# Altium PCB PCB-NW0101 Rev.A.PcbDoc (part 3 of 3)
Units mil, origin at the board's own origin, x right, y up, seen from the top; angles counter-clockwise.
Board outline 787.4 x 1377.95 mil, 6 copper layers (Top, GND, Inner3, Inner4, PWR, Bottom), stack 29.136 mil thick; 118 components, 126 nets, 559 pads, 476 vias.
Unrouted connection lines stored in the file: 214.
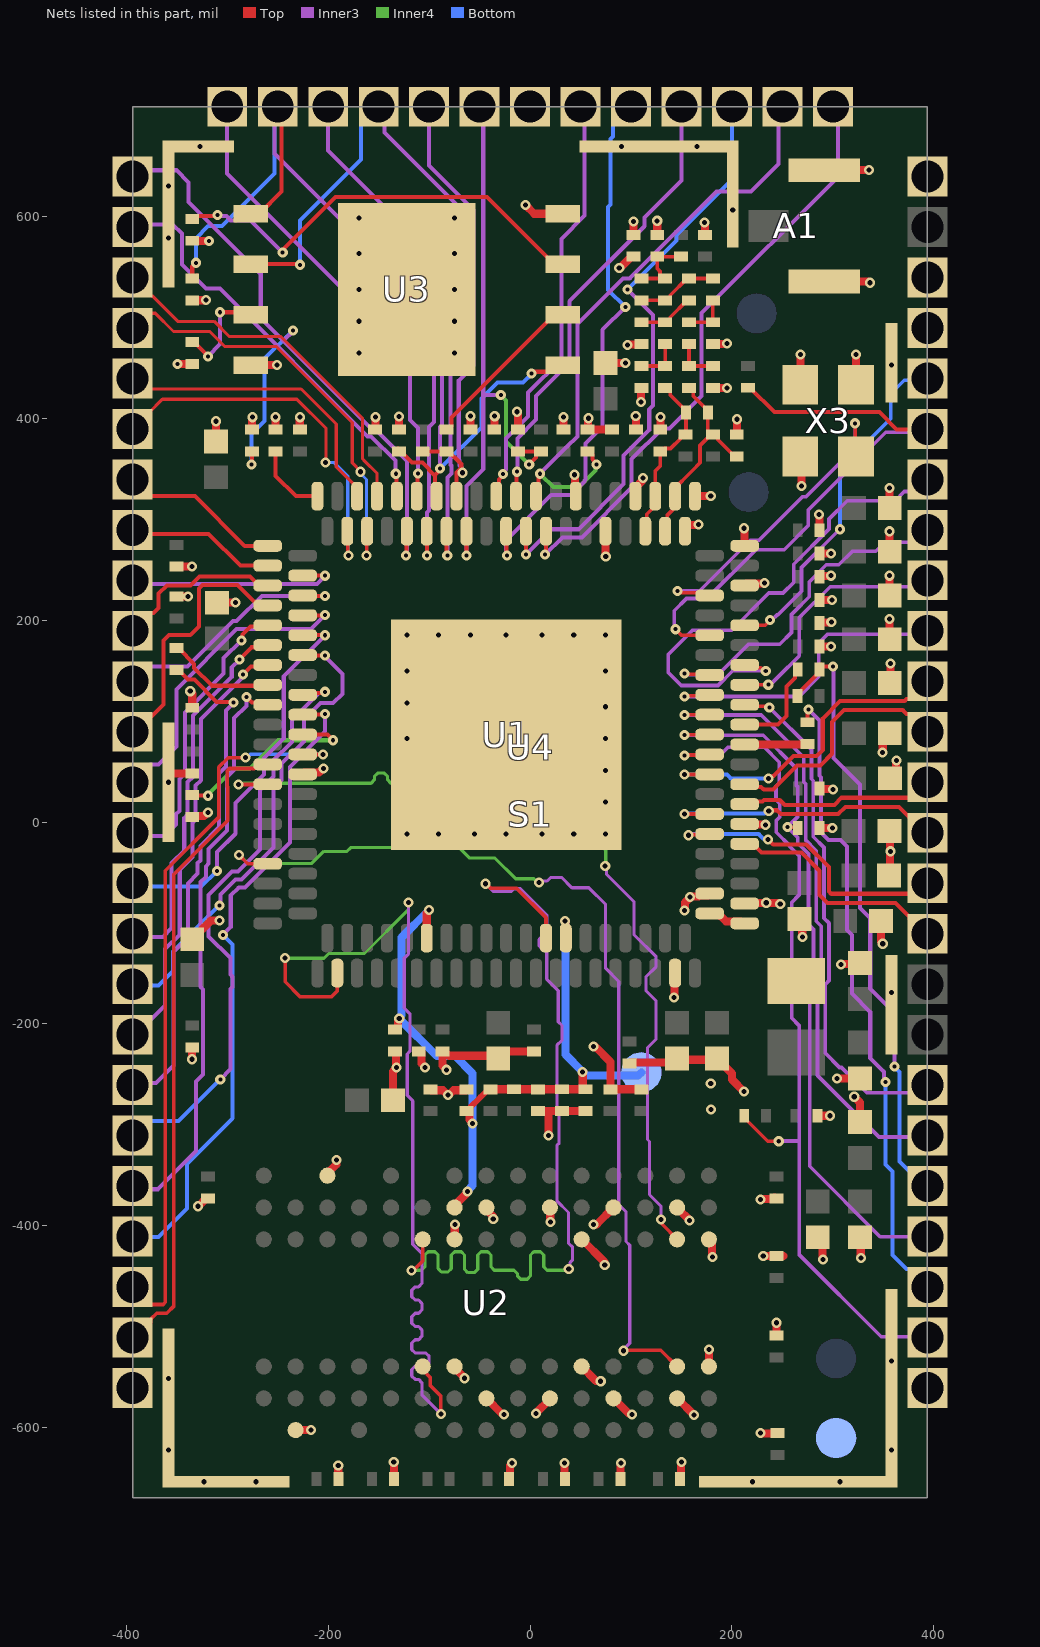
[diagram p7: the nets of this part, all layers, seen from the top]

## Via types
v1: diameter 10, hole 5, Top to Bottom, tented both sides, 397 vias
v2: diameter 10, hole 4, Top to Bottom, tented both sides, 66 vias
v3: diameter 10, hole 5, Top to Bottom, 13 vias

## Nets (pads, with @x,y where several pads share a name; then routed paths per layer and width w, separated by ;. In a path a pad name is that pad's centre, name@x,y a point inside that pad or via, vN(x,y) a via of type N, cw(c..) or ccw(c..) an arc to the next point about the centre after c; other vN are vias at no path point) (continued)
DDR_RAS: U1.81 U2.K7 | length 895.2
  Top w3.63: v1(-242.59,-134.58) -242.59,-158.32 -227.68,-173.23 -196.85,-173.23 -190.95,-167.32 U1.81@-190.95,-149.6 ; U2.K7@-106.3,-539.37 -106.3,-542.72 -98.79,-550.22 -98.79,-558.21 -88.62,-568.38 -88.62,-585.93 v1(-88.24,-586.32)
  Inner3 w3.1: v1(-120.55,-79.6) -120.55,-130.84 -124.65,-134.94 -124.65,-184.31 -119.02,-189.95 -119.02,-227.13 -121.65,-229.76 -121.65,-270.77 -116.22,-276.2 -116.22,-418.41 -106.9,-427.73 -106.9,-448.62 -107.14,-448.85 -107.14,-453 -107.14,-457.19 -110.42,-460.46 -113.87,-460.46 -117.14,-463.74 -117.14,-470.29 -113.87,-473.56 -110.42,-473.56 -107.14,-476.84 -107.14,-483.39 -110.42,-486.67 -113.87,-486.67 -117.14,-489.94 -117.14,-496.49 -113.87,-499.77 -110.42,-499.77 -107.14,-503.04 -107.14,-509.59 -110.42,-512.87 -113.87,-512.87 -117.14,-516.14 -117.14,-522.7 -113.87,-525.97 -103.23,-525.97 -99.95,-529.25 -99.95,-535.8 -103.23,-539.07 -113.87,-539.07 -117.14,-542.35 -117.14,-548.9 -113.87,-552.17 -110.42,-552.17 -107.14,-555.45 -107.14,-557 -107.14,-567.47 -88.3,-586.32 v1(-88.24,-586.32)
  Inner4 w3.09: v1(-242.59,-134.58) -242.17,-135 -204.05,-135 -199.27,-130.22 -163.93,-130.22 -120.55,-86.84 v1(-120.55,-79.6)
DDR_UDM: U1.64 U2.B3 | length 901.2
  Top w3.63: v1(-288.98,37.02) -288.79,37.21 -260.03,37.21 U1.64@-259.84,37.4 ; v1(129.62,-393.67) 130.84,-394.88 130.84,-398.56 U2.B3@145.67,-413.39
  Inner3 w3.1: v1(74.45,-43.65) 75.77,-44.97 75.77,-51.69 102.8,-78.71 102.8,-111.39 124.9,-133.49 124.9,-143.26 114.9,-153.26 114.9,-167.28 124.9,-177.28 124.9,-214.91 116.34,-223.46 116.34,-314.51 118.29,-316.46 118.29,-369.12 129.62,-380.45 v1(129.62,-393.67)
  Inner4 w3.09: v1(-288.98,37.02) -287.68,38.32 -283.84,38.32 -283.74,38.43 -159,38.43 -157.46,38.43 -154.18,41.7 -154.18,45.16 -150.91,48.43 -144.37,48.43 -141.1,45.16 -141.1,41.7 -137.83,38.43 -131.28,38.43 -128.01,41.7 -128.01,45.16 -124.74,48.43 -118.2,48.43 -114.93,45.16 -114.93,41.7 -111.65,38.43 -105.11,38.43 -101.84,41.7 -101.84,45.16 -98.57,48.43 -92.02,48.43 -88.75,45.16 -88.75,41.7 -85.48,38.43 -78.94,38.43 -75.67,41.7 -75.67,45.16 -72.39,48.43 -65.85,48.43 -62.58,45.16 -62.58,41.7 -59.31,38.43 -43,38.43 8.57,38.43 75,-28 75,-43.1 v1(74.45,-43.65)
DDR_UDQS: U1.72 U2.B7 | length 947.3
  Top w3.63: v1(-288.38,-32.62) -279.66,-41.34 U1.72@-259.84,-41.34 ; v1(92.45,-523.78) 92.92,-523.3 129.6,-523.3 U2.B7@145.67,-539.37
  Inner3 w3.1: v1(9.04,-59.74) 10.36,-58.42 16.95,-58.42 20.39,-54.98 31.36,-54.98 41.49,-65.11 58.33,-65.11 74.9,-81.68 74.9,-144.94 87.93,-157.98 87.93,-378.93 95.04,-386.03 95.04,-415.62 98.74,-419.33 98.74,-516.42 92.45,-522.72 v1(92.45,-523.78)
  Inner4 w3.09: v1(-288.38,-32.62) -287.95,-32.62 -279.57,-41 -216.11,-41 -204.19,-29.09 -181.27,-29.09 -177.56,-25.38 -70.19,-25.38 -59.83,-35.74 -34.65,-35.74 -14.13,-56.26 3.69,-56.26 7.17,-59.74 v1(9.04,-59.74)
DDR_VREF: C4.1 C5.1 C11.2 C12.1 C13.1 pad.6 R1.1 R2.2 U1.90 U1.104 U2.J2 | length 789.8
  Top w6: C4.1@-61.02,-286.42 -59.1,-284.5 -59.1,-282.58 -49.1,-272.58 -49.1,-272.53 -40.57,-264 C11.2@-38,-264
  Top w8: C12.1@-133.8,-205.1 -133.49,-204.79 -130.97,-204.79 -130.97,-196.53 -129.57,-195.12 v1(-129.57,-194.58) ; U1.90@-102.36,-114.96 -102.36,-90.03 -99.9,-87.57 v1(-99.9,-87.03) ; U2.J2@-74.8,-381.89 -74.8,-379.73 -62.51,-367.43 -62.51,-366.25 v1(-62.13,-365.87) ; C4.1@-62.99,-286.42 -61.02,-286.42 -60.1,-287.34 -60.1,-294.97 -56.9,-298.17 v1(-56.9,-298.71) ; C11.2@-39.37,-264.76 R1.1@-15.75,-264.76 R2.2@7.87,-264.76 C13.1@31.5,-264.76 52.23,-264.76 52.23,-248.78 51.76,-248.32 v1(51.76,-247.77) ; v1(34.7,-97.98) 35.07,-98.35 35.07,-114.59 U1.104@35.43,-114.96
  Bottom w8: v1@-129.57,-194.04 -128.57,-193.04 -128.57,-192.26 -127.34,-191.03 -127.34,-114.47 v1@-100.29,-87.41 ; v1@-129.15,-195 -92.15,-232 -74,-232 -56.9,-249.1 -56.9,-360.19 -62.13,-365.42 v1(-62.13,-365.87) ; v1(34.7,-97.98) 35,-98.28 35,-230.47 51.76,-247.23 v1(51.76,-247.77) 52.3,-247.77 55.61,-251.08 107.19,-251.08 pad.6@110.24,-248.03
DDR_WE: U1.102 U2.K3 | length 876.3
  Top w3.63: v1(-117.46,-444.2) -115.73,-444.2 -110.51,-438.98 ; -110.47,-438.98 -106.39,-434.91 -106.39,-414.39 U2.K3@-106,-414 ; v1(-44.17,-61.17) -43.28,-61.17 -38.69,-65.76 -13.18,-65.76 15.75,-94.69 U1.102@15.75,-114.96
  Inner3 w3.1: v1(-44.17,-61.17) -43.83,-61.17 -36.47,-68.53 -18.48,-68.53 -16.01,-66.06 -9.62,-66.06 16.61,-92.29 16.61,-95 16.61,-109.65 13.34,-112.93 12.18,-112.93 8.91,-116.2 8.91,-122.75 12.18,-126.03 13.34,-126.03 16.61,-129.3 16.61,-145 16.61,-155.61 28,-167 28,-177.62 28,-197.88 31.66,-201.54 31.66,-216.19 26.63,-221.22 26.63,-283.52 28.75,-285.65 28.75,-318.23 26.63,-320.35 26.63,-375.29 38.1,-386.76 38.1,-417.27 42.13,-421.3 42.13,-433.74 39.67,-436.2 39.67,-441.56 v1(38.35,-442.88)
  Inner4 w3.09: v1(-117.46,-444.2) -117.25,-444 -109,-444 -107.46,-444 -104.18,-440.73 -104.18,-429 -100.91,-425.73 -94.37,-425.73 -91.1,-429 -91.1,-442.45 -87.83,-445.72 -81.28,-445.72 -78.01,-442.45 -78.01,-429 -74.74,-425.73 -68.2,-425.73 -64.93,-429 -64.93,-443.16 -61.65,-446.44 -55.11,-446.44 -51.84,-443.16 -51.84,-429 -48.57,-425.73 -42.02,-425.73 -38.75,-429 -38.75,-440.73 -35.48,-444 -15.85,-444 -12.58,-447.27 -12.58,-449.64 -9.31,-452.91 -2.77,-452.91 0.51,-449.64 0.51,-429 3.78,-425.73 10.32,-425.73 13.59,-429 13.59,-440.73 16.86,-444 20,-444 37.22,-444 v1(38.35,-442.88)
EPHY_VRT: R23.1 U1.39 | length 73.8
  Top w4: R23.1@-251.97,367.13 -251.97,342.97 -231.84,322.84 U1.39@-210.63,322.84
ETH_RN: U1.34 U4.B4 | length 411.8
  Top w3.12: U4.B4@-381,504 -371.31,504 -353.18,485.87 -317.12,485.87 -302.12,470.88 -251.19,470.88 -176.11,395.8 -176.11,355.71 -168,347.6 v1(-168,347) ; v1(-162,264) -161.71,264.29 -161.71,287.9 U1.34@-161.42,288.19
  Bottom w3.12: v1(-168,347) -168,345.31 -162,339.31 v1(-162,264)
ETH_RP: U1.33 U4.B3 | length 348
  Top w3.12: U4.B3@-379.17,524.83 -375.57,521.24 -374.24,521.24 -348.99,495.99 -312.93,495.99 -297.93,481 -247,481 -165.99,399.99 -165.99,359.9 -163.65,357.56 -151.58,345.51 U1.33@-151.58,322.84
ETH_TN: U1.36 U4.B6 | length 358.9
  Top w3.12: U4.B6@-378,405.07 -364.2,418.86 -230.93,418.86 -202.12,390.05 -202.12,356.44 v1(-202.56,356) ; U1.36@-181.1,288.19 -180.55,287.64 -180.55,264.55 v1(-180,264)
  Bottom w3.12: v1(-202.56,356) -193.79,356 -180.55,342.76 -180.55,264.55 v1(-180,264)
ETH_TP: U1.35 U4.B5 | length 284.6
  Top w3.12: U4.B5@-380.51,424.8 -376.33,428.98 -371.16,428.98 -226.74,428.98 -192,394.24 -192,351.84 -171.26,331.1 U1.35@-171.26,322.84
GND: A1.2 A1.3 C1.2 C2.2 C3.2 C4.2 C5.2 C6.2 C7.2 C8.2 C9.2 C10.2 C12.2 C13.2 C14.2 C15.2 C16.2 C17.2 C18.2 C19.2 C20.2 C21.2 C22.2 C23.2 C24.2 C25.2 C26.2 C27.2 C28.2 C29.2 C30.2 C31.2 C32.2 C33.2 C34.2 C35.2 C36.2 C37.2 C38.2 C39.2 C40.2 C41.2 C42.2 C43.2 C44.2 C45.2 C46.2 C47.2 C48.2 C49.2 C50.2 C51.1 C52.2 C54.2 C55.2 C58.2 C61.2 C62.2 C63.1 C64.2 C65.2 C66.2 C67.2 C68.2 C69.2 C70.2 C71.2 C72.2 C73.2 C74.2 C75.2 C76.2 C77.2 C78.2 C79.2 C80.2 L5.2 pad.2 R2.1 R8.1 R15.1 R17.1 R18.1 R19.1 R23.2 R24.2 S1.1 S1.2 S1.3 S1.4 S1.5 S1.6 S1.7 S1.8 S1.9 S1.10 S1.11 U1.1 U1.2 U1.7 U1.10 U1.13 U1.63 U1.115 U1.120 U1.121 U1.128 U1.152 U1.156 U1.157 U2.A3 U2.A7 U2.B2 U2.B8 U2.D2 U2.D8 U2.E3 U2.E7 U2.F2 U2.F8 U2.H2 U2.H8 U2.J3 U2.J7 U2.N1 U2.P9 U3.4 U3.9 U4.B25 U4.C1 U4.C3 U4.C4 U4.C25 X3.1 X3.2 X3.4 | length 2465.2
  Top w8: v1(-358.27,39.37) -358.27,46.32 -356.36,48.23 C34.2@-334.65,48.23 ; C14.2@-350.39,223.43 -350.34,223.37 -338.86,223.37 v1(-338.81,223.32) ; C16.2@-350.39,252.95 v1(-335,253) ; v1(-336.63,129.58) -336.63,129.04 -334.65,127.06 C23.2@-334.65,113.19 ; v1(-335,-235) -334.82,-234.82 -334.82,-223.6 C64.2@-334.65,-223.43 ; C1.2@-334.65,-116.14 -316.11,-97.6 v1(-307.5,-97.6) ; R24.2@-334.65,4.92 -333.72,5.84 -323.14,5.84 -319.54,9.44 v1(-319,9.44) ; v1(-328.9,-380.62) -328.45,-380.62 -320.87,-373.03 C9.2@-318.9,-373.03 ; C17.2@-311,377 v1@-311,396 ; C35.2@-310,217.2 -309.88,217.32 -292.09,217.32 v3(-291.97,217.45) ; U3.4@-276.55,452.56 v1(-250.55,452.56) ; R17.1@-275.59,388.78 -275.3,389.08 -275.3,400.7 v1(-275,401) ; R23.2@-251.97,388.78 v1(-252,401) ; U2.P9@-232.28,-602.36 v1(-217.1,-602.36) ; v1(-228,401) -228.17,400.83 -228.17,389.7 C80.2@-227.64,389.17 ; U1.63@-225.2,47.25 -223.38,49.07 -209.02,49.07 -205.25,52.84 v1(-204.71,52.84) ; U2.N1@-200.79,-350.39 -200.79,-348.23 v1@-191.93,-339.37 ; v1(-191.55,-334.91) v1@-191.17,-334.52 ; C70.2@-189.98,-649.05 v1(-189.98,-637.52) ; C15.2@-153.27,388.8 -153.27,400.73 v1(-153,401) ; C74.2@-135.83,-275.59 -135.83,-247.16 -132.2,-243.54 v1(-132.2,-243) -132.59,-242.62 -132.59,-228.28 -133.51,-227.36 C12.2@-133.86,-227.36 ; v1(-135,-634) -134.92,-634.08 C67.2@-134.92,-653.46 ; R18.1@-129.92,388.78 v1(-129.92,401.57) ; C22.2@-110.24,-227.36 -108.27,-227.36 -107.35,-228.28 -107.35,-239.11 -104,-242.46 v1(-104,-243) ; C73.2@-98.42,-264.76 -97.5,-265.69 -86.37,-265.69 -82.01,-270.05 -81.05,-270.05 v1@-81,-270 ; C20.2@-86.61,-228.28 -83.72,-228.28 -80.44,-231.57 -34.18,-231.57 C2.2@-31.5,-234.25 ; C20.2@-86.61,-227.36 -86.61,-228.09 -86.81,-228.28 -86.81,-241.1 -82.58,-245.33 v1(-82.58,-245.45) ; v1(-81.09,-270.43) -80.55,-270.43 -75.8,-265.69 -63.91,-265.69 C4.2@-62.99,-264.76 ; U2.J7@-74.8,-539.37 -74.8,-540.65 -65,-550.46 v1(-65,-551) ; U2.J3@-74.8,-413.39 -74.59,-413.18 -74.59,-399.1 v1(-74.38,-398.88) ; C19.2@-59.03,388.81 v1@-59.03,401.55 ; U2.H8@-43.31,-570.87 -27.56,-586.62 -26.38,-586.62 v1(-26,-587) ; U2.H2@-43.31,-381.89 -43.31,-384.05 -36.84,-390.53 -36.84,-392.91 v1(-36.45,-393.29) ; C24.2@-35.43,388.78 -35.22,389 -35.22,401.36 v1@-35.43,401.57 ; v1@-35.22,401.78 v1(-35,402) ; C2.2@-31.5,-231.57 -27.29,-227.36 C77.2@3.94,-227.36 ; C69.2@-20.33,-653.21 -19.75,-652.62 -19.75,-637.29 -18,-635.54 v1(-18,-635) ; v1(-13,406.43) -13,405.89 -11.91,404.8 -11.91,389.7 -11.81,389.61 R19.1@-11.81,388.78 ; v1(6,-586) 6,-585.46 19.68,-571.77 U2.F8@19.68,-570.87 ; R2.1@9.84,-286.42 31.62,-286.42 56.59,-286.42 55.6,-287.4 C5.2@55.12,-287.4 ; v1(18.2,-310.74) 18.2,-286.48 18.26,-286.42 ; U2.F2@19.68,-381.89 19.98,-382.19 19.98,-395.85 v1(20.28,-396.15) ; C43.2@33,388.83 v1(33,401) ; v1(34,-635) 34.22,-635.22 34.22,-652.77 C68.2@34.72,-653.27 ; v1(44,344) 44.38,343.62 44.38,323.73 U1.13@45.28,322.84 ; U2.E7@51.18,-539.37 65.43,-553.62 69.62,-553.62 v1(70,-554) ; U2.E3@51.18,-413.39 73.61,-435.81 73.61,-438.62 v1(73.99,-439) ; R15.1@55.3,388.83 C46.2@81,388.83 ; R15.1@56.7,388.83 57.62,389.75 57.62,399.61 v1(58,399.99) ; v1(62.85,-398.9) 63.24,-398.52 66.05,-398.52 U2.D2@82.68,-381.89 ; v3(63.02,-222.23) 63.41,-222.61 64.78,-222.61 79.81,-237.65 C65.2@79.81,-264.76 C72.2@110.24,-264.76 ; U1.10@74.8,288.19 74.9,288.09 74.9,263.1 v1(75,263) ; C42.2@74.8,454.72 74.87,454.79 94.28,454.79 v1(94.35,454.86) ; U2.D8@82.68,-570.87 98.43,-586.62 100.62,-586.62 v1(101,-587) ; v3(88.38,548.95) 88.76,549.33 89.68,549.33 100.39,560.04 C75.2@102.36,560.04 ; C8.2@89.78,-653.33 89.78,-635.22 v1(90,-635) ; v1(96.56,472.44) 96.56,473.21 110.02,473.21 L5.2@110.24,473.43 ; C78.2@98.42,-239.17 99.35,-238.25 141.67,-238.25 C3.2@145.67,-234.25 ; U1.7@104.33,322.84 104.33,331.18 111.32,338.16 111.32,340.45 v1(111.7,340.84) ; v1@104.7,403.05 105,402.75 C47.2@105,388.83 ; v1(110,416) 110.12,416.12 110.12,430 C55.2@110.24,430.12 ; C61.2@125.98,581.69 v1(125.97,595.59) ; C51.1@129,388.83 129.04,388.87 129.04,401.01 v1(129.08,401.05) ; v1(142.7,-174) 143.09,-173.62 143.09,-150.22 U1.115@143.7,-149.6 ; U2.B8@145.67,-570.87 145.8,-570.87 162.28,-587.35 v1(162.4,-587.35) ; U2.B2@147,-383 147,-383.57 157.83,-394.4 v1(157.83,-394.74) ; C7.2@148.81,-653.35 149.54,-652.62 149.54,-635 150,-634.54 v1(150,-634) ; C3.2@148.94,-230.98 153.48,-235.52 186.3,-235.52 200.02,-249.23 200.02,-255.12 v1(212.04,-267.14) ; v3(153.15,-87.46) 153.53,-87.08 153.53,-79.57 158.38,-74.72 v1(158.38,-74.18) 158.76,-73.8 166.68,-73.8 167.79,-72.69 176.13,-72.69 U1.121@177.95,-70.86 ; U1.2@153.54,288.19 153.54,292.34 155.44,294.23 166.58,294.23 v1(166.97,294.62) ; U1.1@163.39,322.84 163.47,322.92 178.92,322.92 v1(179,323) ; v1(173,594) 173.11,593.89 173.11,581.81 C62.2@173.23,581.69 ; U2.A7@177.16,-539.37 v1(177.16,-522.37) ; U2.A3@177.16,-413.39 177.16,-415.55 180.34,-418.72 180.34,-430.7 v1(180.72,-431.09) ; C54.2@181.1,430.12 181.16,430.06 194.94,430.06 v1(195,430) ; C58.2@181.1,473.43 181.39,473.71 194.71,473.71 v1(195,474) ; C52.2@201.83,384.75 204.86,384.75 204.86,398.86 v1(205,399) ; v1(212,291) 212.3,290.7 212.3,273.92 U1.156@212.6,273.62 ; U1.120@212.6,-80.71 212.95,-80.35 233.65,-80.35 v1(234,-80) 234.38,-80.38 246.43,-80.38 247.33,-81.29 v3(247.88,-81.29) ; U1.128@212.6,-1.97 212.99,-2.36 232.8,-2.36 v1(233.18,-2.74) ; U1.152@212.6,234.25 214.42,236.08 230.99,236.08 231.64,236.73 v1(232.18,236.73) ; v1(228.35,-605.32) 228.73,-605.7 244.48,-605.7 C10.2@245.08,-606.3 ; v1(228.35,-374.02) 228.73,-373.63 241.2,-373.63 241.95,-372.88 C6.2@241.95,-372.11 ; v1(231,-430) 231.06,-430.06 245.08,-430.06 251.02,-430.06 251.07,-430.12 ; C71.2@244.09,-508.86 v1(244.09,-496.06) ; C26.2@262.19,-95.38 269.62,-102.81 269.62,-113.62 v1(270,-114) ; X3.1@268,437.29 v1(268,463) ; v1(269,333) X3.2@269,356.98 ; C50.2@284.83,-291 v1(297,-291) ; C79.2@285,-411.42 289.89,-416.31 289.89,-433.12 v3(290.27,-433.5) ; v1(286.32,304.64) 286.58,304.39 286.58,289.25 C45.2@286.83,289 ; C39.2@286.41,264.77 287.64,266 v1(298,266) ; R8.1@286.83,-6 v1(299.41,-6) ; C63.1@286.83,33 287.13,32.7 299.77,32.7 v1(300.07,32.4) ; C18.2@286.83,197 287.53,197.7 298.03,197.7 v1(298.41,198.09) ; C41.2@287.05,219.53 287.39,219.87 299,219.87 v1(299.13,219.74) ; C37.2@287.25,243 287.25,243.12 287.75,243.62 297.62,243.62 v1(298,244) ; C21.2@291.23,174 v1(298,174) ; A1.2@291.34,535.43 291.4,535.37 334.89,535.37 336.04,534.21 v1(336.58,534.21) ; A1.3@291.34,645.67 291.37,645.71 v1(335.93,645.74) v1(335.93,645.74) ; v1(304,-254) C30.2@322.97,-253.97 ; v1(308,-141) 308.38,-140.62 318.96,-140.62 322.83,-136.74 C31.2@322.83,-136.53 ; v1(321.16,-272.16) 326.89,-277.89 326.89,-293.19 C49.2@322.83,-297.24 ; C48.2@322.83,-411.42 327.62,-416.2 327.62,-431.62 v1(328,-432) ; X3.4@323,437.17 v1(323,463) ; C25.2@347.72,-94.06 347.72,-118.33 349.42,-120.03 v1(349.42,-120.57) ; C27.2@348.3,-55.12 C27.2@348.65,-55.47 ; v1(349,69) 349.38,69.38 349.38,80.95 C29.2@356.43,88 ; C28.2@355.85,-9 C28.2@355.92,-9.08 ; C27.2@356,-54 356.62,-53.38 356.62,-29.38 v1(357,-29) 356.62,-28.62 356.62,-12.38 C28.2@358,-11 ; v1(356,201) 356.15,200.85 356.15,181.25 C40.2@356.3,181.1 C40.2@356.3,185 ; v1(356,244) 356.15,243.85 356.15,224.56 C36.2@356.3,224.41 C36.2@356.3,230 ; v1(356,288) 356.15,287.85 356.15,262.54 356.62,262.08 356.3,261.76 C38.2@356.3,268 ; v1(356,331) 356.15,330.85 356.15,311.17 C44.2@356.3,311.02 ; C32.2@356.3,43.31 362.62,49.63 362.62,60.62 v1(363,61) ; C33.2@356.3,137.79 357,138.5 v1@357,156
  other v1: -322.83,-653.54 -271.65,-653.54 220.47,-653.54 307.09,-653.54 -358.27,-622.05 358.27,-622.05 -358.27,-551.18 358,-534 358,-169 -122.05,-11.81 -90.55,-11.81 -55.12,-11.81 -23.62,-11.81 11.81,-11.81 43.31,-11.81 74.8,-11.81 74.8,19.69 74.8,51.18 -122.05,82.68 74.8,82.68 74.8,114.17 -122.05,118.11 -122.05,149.61 74.8,149.61 357,157 -122.05,185.04 -90.55,185.04 -59.06,185.04 -23.62,185.04 11.81,185.04 43.31,185.04 74.8,185.04 -311,397 -59,402 104.7,402.05 358.27,452.76 -169.29,464.57 -74.8,464.57 -169.29,496.06 -74.8,496.06 -169.29,527.56 -74.8,527.56 -169.29,562.99 -74.8,562.99 -358.27,578.74 -169.29,598.43 -74.8,598.43 200.79,606.3 -358.27,629.92 -326.77,669.29 90.55,669.29 165.35,669.29
  other v3: 179.12,-284.86 179.03,-259.22
I2C_SCL: U1.20 U4.A5 | length 521.4
  Top w4: U1.20@-23.62,288.19 -23.31,287.88 -23.31,264.31 v2(-23,264)
  Inner3 w4: v2(-23,264) -24,265 -24,279 21,324 40.56,324 54,337.44 54,338.29 55,339.29 55,375 72,392 72,487.65 v2(94.35,510)
  Bottom w4: U4.A5@82.31,690.98 82.31,679.24 79.55,676.47 79.55,611.52 77.38,609.35 77.38,526.96 v2(94.35,510)
I2C_SDA: U1.21 U4.A6 | length 404.3
  Top w4: U1.21@-33.46,322.84 -30.88,325.42 -30.88,339.18 -26.68,343.38 v2(-26.68,344.74)
  Inner3 w4: v2(-26.68,344.74) -26.68,346.36 -23.82,349.22 -23.82,380.06 -2,401.88 -2,425.31 31,458.31 31,577.77 54,600.77 U4.A6@54,690.92
I2S_CLK: U1.19 U4.A4 | length 436.5
  Top w4: U1.19@-13.78,322.84 -13.3,323.31 -13.3,346.52 v2(-12.82,347)
  Inner3 w4: v2(-12.82,347) -12.53,347.29 -12.53,380.03 6,398.57 6,422 39,455 39,515.89 113.29,590.18 113.29,598.85 150,635.56 U4.A4@150,691.51
I2S_SDI: U1.16 U4.A1 | length 585
  Top w4: v2(15,265) 15.75,265.75 U1.16@15.75,288.19
  Inner3 w4: v2(15,265) 32,282 51.31,282 100.7,331.39 100.7,359.6 131.14,390.05 138.05,390.05 170,422 170,504.11 305,639.11 U4.A1@305,690.98
I2S_SDO: R15.2 U1.17 U4.A2 | length 583.4
  Top w4: U1.17@5.91,322.84 8.49,325.42 8.49,341.87 10,343.38 v2(10,345) ; R15.2@57,367.17 58.97,367.17 61.89,364.25 61.89,359.34 66,355.23 v2(66,354)
  Inner3 w4: v2(10,345) 36.35,371.35 47,382 47,493.56 92,538.56 98.76,538.56 184.68,624.48 218.82,624.48 246.32,651.97 U4.A2@246.32,692.88
  Inner4 w4: v2@11,344 23,332 48.56,332 64.85,348.3 64.85,352.85 v2(66,354)
I2S_WS: U1.18 U4.A3 | length 570.7
  Top w4: v2(-4,265) -3.94,265.06 U1.18@-3.94,288.19
  Inner3 w4: v2(-4,265) 21,290 48,290 92.7,334.7 92.7,362.92 118.08,388.3 118.08,408.52 122,412.44 122,502.11 v2(96.55,527.56)
  Bottom w4: v2(96.55,527.56) 145,576 145,581.56 200,636.56 U4.A3@200,691.11
IO11: U1.29 U4.A13 | length 446.6
  Top w4: U1.29@-112.2,322.84 -111.6,323.44 -111.6,344.6 v2(-111,345.2)
  Inner3 w4: U4.A13@-300,690.61 -300,642.33 -118.92,461.25 -118.92,398.37 -111,390.44 v2(-111,345.2)
IO14: U1.40 U4.B7 | length 136.6
  Top w4: U4.B7@-376.01,322.83 -331.83,322.83 -282.62,273.62 U1.40@-259.84,273.62
IO15: U1.42 U4.B8 | length 129.4
  Top w4: U4.B8@-376.13,285.53 -318.53,285.53 -286.94,253.94 U1.42@-259.84,253.94
IO16: U1.43 U4.B9 | length 198.3
  Top w4: U1.43@-225.2,244.1 -203.1,244.1 v2(-203,244)
  Inner3 w4: U4.B9@-375.74,236 -211,236 v2(-203,244)
IO17: U1.44 U4.B10 | length 151.5
  Top w4: U4.B10@-382,201.07 -376.01,207.05 -372.95,207.05 -372,208 -371.92,208 -367.89,212.03 -367.89,226.22 -359.77,234.35 -336.28,234.35 -327.61,243.01 -277.23,243.01 -268.47,234.25 U1.44@-259.84,234.25
IO38: R8.2 U1.137 U4.C22 | length 700.3
  Top w3.63: v2(153,86) 153.31,86.31 177.64,86.31 U1.137@177.95,86.62 ; v2(254.91,-5.09) v2@256.09,-5.09 ; v2@256,-5 v2@256.09,-5.09 ; R8.2@265.17,-6 R8.2@264.26,-5.09 ; R8.2@267,-5 266.91,-5.09 R8.2@264.26,-5.09 ; v2@256.09,-5.09 R8.2@264.26,-5.09
  Inner3 w3.63: v2(153,86) 231,86 263.55,53.45 263.55,36.44 265.32,34.67 265.32,5.51 254.91,-4.91 v2(254.91,-5.09) 265.11,-15.29 265.11,-20.75 275.91,-31.56 275.91,-101.56 280.82,-106.47 280.82,-150.8 277.06,-154.55 277.06,-341.06 346.76,-410.76 373.86,-410.76
IO44: U1.144 U4.C7 | length 473.9
  Top w3.63: U1.144@212.6,155.51 215.26,152.85 228.7,152.85 231.78,149.78 v2(233.5,149.78)
  Inner3 w3.63: v2(233.5,149.78) 200.87,149.78 186.28,135.18 149.82,135.18 137,148 137,166 161,190 199.7,190 236.52,226.82 250.65,226.82 261.2,237.36 261.2,255.29 296.18,290.28 296.18,300.18 314.35,318.35 361.66,318.35 370.69,327.39 U4.C7@378.57,327.39
JTAG_TCK: U1.140 U4.C19 | length 491.7
  Top w3.63: U1.140@212.6,116.14 213.97,114.77 235.78,114.77 v2(237,113.55)
  Inner3 w3.63: v2(237,113.55) 278.82,71.73 278.82,42.76 280.59,40.99 280.59,-14.65 291.18,-25.24 291.18,-95.24 296.09,-100.14 296.09,-157.12 292.33,-160.87 292.33,-228.89 306.62,-243.18 308.48,-243.18 333.5,-268.21 373.82,-268.21
JTAG_TDI: U1.142 U4.C9 | length 233.3
  Top w3.63: U1.142@212.6,135.83 212.68,135.91 235.91,135.91 v2(236,136)
  Inner3 w3.63: v2(236,136) 237.72,136 240.48,138.76 240.76,138.76 245.68,143.68 266.57,164.57 266.57,202.48 297.28,233.18 376.71,233.18 377.53,234 U4.C9@383,234
JTAG_TDO: U1.143 U4.C8 | length 323.5
  Top w3.63: v2(153.15,147.15) 153.89,146.41 177.21,146.41 U1.143@177.95,145.67
  Inner3 w3.63: v2(153.15,147.15) 154.3,146 186.3,146 216.48,176.18 247.48,176.18 258.94,187.64 258.94,205.64 276.47,223.17 276.47,237.76 293.52,254.82 305.91,254.82 319.45,268.35 342.52,268.35 351.17,277 U4.C8@377.39,277
JTAG_TMS: U1.141 U4.C10 | length 294.7
  Top w3.63: v2(153,124.37) 153.81,125.18 177.14,125.18 U1.141@177.95,125.99
  Inner3 w3.63: v2(153,124.37) 266.37,124.37 286,144 286,177.3 294.7,186 U4.C10@377,186
JTAG_TRST: U1.139 U4.C20 | length 600.5
  Top w3.63: v2(153,106) 153.15,106.15 177.8,106.15 U1.139@177.95,106.3
  Inner3 w3.63: v2(153,106) 229,106 271.18,63.82 271.18,39.6 272.96,37.83 272.96,-17.81 283.55,-28.4 283.55,-98.4 288.45,-103.3 288.45,-153.96 284.7,-157.71 284.7,-251 345.7,-312 U4.C20@375.67,-312
LXBK: L1.1 U1.118 U1.119 | length 37.4
  Top w8: U1.119@177.95,-90.55 186.29,-90.55 194.31,-98.57 208.57,-98.57 U1.118@211,-101
PCIE_CKN: U1.132 U4.C12 | length 226.2
  Top w4.09: U1.132@213.2,37.4 215.77,34.83 228.9,34.83 231.54,32.19 240.69,32.19 264.62,56.12 287.58,56.12 299.09,67.63 299.09,98.94 311,110.85 369.17,110.85 373.01,107.01 376.06,107.01 379.96,103.11 U4.C12@379.96,99.96
PCIE_CKP: U1.133 U4.C11 | length 300.6
  Top w4.09: v1(153,47) 153.12,47.12 177.83,47.12 U1.133@177.95,47.25 ; v1(236.12,43.23) 237.72,43.23 240.12,45.64 241.28,45.64 260.86,65.21 283.81,65.21 290,71.4 290,102.71 307.23,119.94 371.22,119.94 373.01,121.73 U4.C11@376.06,121.73
  Bottom w4.08: v1(153,47) 195,47 198.88,43.12 236,43.12 v1(236.12,43.23)
PCIE_RXN: U1.130 U4.C13 | length 175.7
  Top w4.09: U1.130@212.6,17.72 215.17,20.29 230.29,20.29 231.91,21.91 247.36,21.91 252.31,16.95 301.49,16.95 308.63,24.09 U4.C13@381.57,24.09
PCIE_RXP: U1.129 U4.C14 | length 259
  Top w4.09: v1(153,8) 153.06,7.94 177.89,7.94 U1.129@177.95,7.88 ; v1(236.49,10.86) 237.24,11.61 244.8,11.61 248.55,7.86 305.26,7.86 312.39,15 365.54,15 376.06,4.48 U4.C14@376.06,3.86
  Bottom w4.08: v1(153,8) 153.3,8.3 232.33,8.3 234.89,10.86 v1(236.49,10.86)
PCIE_TXN: U1.126 U4.C16 | length 209.6
  Top w4.09: U1.126@212.6,-21.65 220.87,-21.65 229.46,-30.24 268.85,-30.24 286.91,-48.3 286.91,-72.42 294.63,-80.14 362.03,-80.14 376.06,-94.17 U4.C16@376.06,-96.14
PCIE_TXP: U1.127 U4.C15 | length 283.5
  Top w4.09: v1(157,-13.1) 157.65,-12.46 177.31,-12.46 U1.127@177.95,-11.81 ; v1(235.54,-17.41) 236.15,-17.41 240.89,-22.15 273.61,-22.15 296,-44.54 296,-68.66 298.4,-71.05 U4.C15@380,-71.05
  Bottom w4.08: v1(157,-13.1) 158.1,-12 226.51,-12 230.8,-16.28 234.41,-16.28 v1(235.54,-17.41)
PERST_N: R16.1 U1.135 U4.C24 | length 844.8
  Top w3.63: v2(153,66) 153.47,66.47 177.49,66.47 U1.135@177.95,66.93 ; R16.1@212.17,-291 212.17,-292.97 235.44,-316.23 v2(246.36,-316.23)
  Inner3 w3.63: v2(153,66) 188,66 196,74 232.2,74 246.93,59.27 246.93,38.75 243.69,35.51 243.69,22.01 247.31,18.39 247.31,4.9 244,1.59 244,-10.23 257.47,-23.7 257.47,-24.44 266.54,-33.51 266.54,-72.32 259.18,-79.67 259.18,-194.16 266.54,-201.52 266.54,-428.54 348,-510 U4.C24@375.94,-510 ; v2(246.36,-316.23) 246.59,-316 266,-316
PORST_N: R11.2 R13.1 U4.C21 | length 578.6
  Top w4: R13.1@265.06,126.97 R11.2@285.91,147.81 ; R11.2@287.75,153.89 287.86,154 v2(300,154)
  Top w8: R13.1@265.06,125 R13.1@265.06,126.97 ; R11.2@286.83,151 286.83,152.97 R11.2@287.75,153.89
  Inner3 w4: v2(300,154) 300.82,153.18 300.82,63.3 327,37.11 327,-85.22 337,-95.22 337,-165 361,-189 v2(361,-242)
  Bottom w4: v2@361,-242.54 366.01,-247.56 366.01,-336.09 U4.C21@376.01,-346.09
  Bottom w8: v2@361,-242.54 v2(361,-242)
PORST_N_1: R11.1 U1.138 | length 95.6
  Top w4: U1.138@212.6,96.46 245.46,96.46 254.14,105.14 254.14,134.37 262.25,142.49 262.25,148.08 R11.1@265.17,151
PWM0: U1.45 U4.B11 | length 224.4
  Top w4: U1.45@-225.2,224.41 -224.79,224 v2(-203,224)
  Inner3 w4: U4.B11@-376.01,153.91 -339.3,153.91 -294.2,199 -290.74,199 -265.74,224 v2(-203,224)
PWM1: U1.46 U4.B12 | length 237.5
  Top w4: U4.B12@-375.74,104.18 -363.28,116.64 -363.28,172.71 -363.28,179.65 -357.86,185.07 -336.6,185.07 -327.81,193.86 -327.81,231.5 -324.3,235.01 -289.9,235.01 -273.36,218.47 -273.17,218.47 -269.26,214.57 U1.46@-259.84,214.57
REF_CLKO: R10.1 U4.C23 | length 618.2
  Top w4: R10.1@275,98.83 275,110.43 v2(275.89,111.32)
  Inner3 w4: v2(275.89,111.32) 286.64,100.57 286.64,46 288.41,44.23 288.41,-10.56 295.85,-18 307.56,-18 314,-24.44 314,-107 319,-112 319,-170 337,-188 337,-233.56 350.85,-247.41 350.85,-256.24 v2(352,-257.39)
  Bottom w4: v2(352,-257.39) 352,-339.27 359,-346.27 359,-429.08 372.87,-442.95 U4.C23@376.95,-442.95
REF_CLKO_1: R10.2 U1.136 | length 62.5
  Top w8: U1.136@212.6,76.77 212.8,76.97 R10.2@274.97,76.97
RF_DIFF+: C56.1 C59.2 L5.1 | length 57.3
  Top w3.63: L5.1@110,494 111.08,495.08 C56.1@132,495.08 ; C56.1@132,497 137.75,497 138.93,498.18 138.93,500.15 155.51,516.73 C59.2@157.48,516.73
RF_DIFF-: C57.1 C58.1 L4.1 | length 45.7
  Top w3.63: C57.1@157.48,495.08 C58.1@181.1,495.08 C58.1@182,496 ; C58.1@181,496 181.1,496.1 L4.1@181.1,516.73
RF_HP+: C55.1 C56.2 L2.2 | length 45.9
  Top w3.63: C55.1@110,450 111.77,451.77 L2.2@133.86,451.77 133.86,472.86 C56.2@134,473
RF_HP-: C54.1 C57.2 L3.2 | length 47.3
  Top w3.63: C57.2@158,474 157.48,473.48 C57.2@157.48,473.43 L3.2@157.48,451.77 C54.1@181.1,451.77 181.23,451.77 C54.1@182,451
RF_LP: C60.1 C61.1 L6.2 L7.1 | length 74.1
  Top w3.63: C60.1@110,537 111.39,538.39 L6.2@133.86,538.39 131.89,538.39 128.79,541.49 128.79,545.43 125.98,548.23 C61.1@125.98,560.04 127.95,560.04 L7.1@149.61,560.04
RF_LP+: C51.2 C53.1 L2.1 R9.1 U1.5 U1.6 | length 165.7
  Top w3.63: U1.6@114.17,288.19 115.58,289.6 115.58,304.88 U1.5@124.02,313.32 ; U1.5@124.02,322.84 124.02,347.72 128.83,352.53 128.83,365.83 C51.2@130.13,367.13 ; C51.2@129.92,367.13 132.85,370.05 139.25,370.05 148.93,379.73 148.93,380.72 150.1,381.89 154.53,381.89 C53.1@154.53,405.51 ; L2.1@134,430 135.94,430 138.93,427.01 138.93,423.08 154.53,407.48 C53.1@154.53,405.51 C53.1@155,406
RF_LP-: C52.1 C53.2 L3.1 R12.1 U1.3 U1.4 | length 208
  Top w3.63: U1.4@133.86,288.19 136.07,290.4 136.07,304.07 141.04,309.04 141.04,328.44 161.11,348.51 168.39,355.8 168.39,373.09 178.31,383 183.9,383 186.17,380.72 186.17,378.75 202.76,362.17 C52.1@204.72,362.17 ; L3.1@157.48,430.12 158.53,430.12 161.64,427.01 161.64,422.02 176.18,407.48 C53.2@176.18,405.73 ; C53.2@176,406 176,403.73 C53.2@177.36,402.36 ; R12.1@178.56,384.56 176.18,386.93 176.18,401.18 C53.2@179,404
RF_NOTCH: C59.1 C60.2 L4.2 L6.1 | length 83.7
  Top w3.63: C60.2@110,516 110.73,516.73 L6.1@133.86,516.73 ; L6.1@134,516 135.09,516 138.93,519.84 138.93,521.81 155.51,538.39 C59.1@157.48,538.39 L4.2@181.1,538.39 182.61,538.39 L4.2@183,538
RXD0: U1.31 U4.B2 | length 392.8
  Top w4: v2(-133,345) -132.44,344.44 -132.44,323.39 U1.31@-131.89,322.84
  Inner3 w4: U4.B2@-375.6,592 -354,592 -345,583 -345,552.44 -320.94,528.38 -307.25,528.38 -160.87,382 -157.44,382 -133.44,358 -133.44,345.44 v2(-133,345)
RXD1: U1.148 U4.C5 | length 330.1
  Top w3.63: U1.148@212.6,194.88 232.88,194.88 237.83,199.83 v2(237.83,200.21)
  Inner3 w3.63: v2(237.83,200.21) 239.55,200.21 244.52,205.18 245.48,205.18 268.83,228.53 268.83,252.13 305.3,288.6 308.4,288.6 v2(307,290)
  Bottom w3.63: v2(307,290) 307,349.52 357.24,399.76 357.24,424.24 370.69,437.69 U4.C5@376.07,437.69
RXD2: U1.48 U4.B14 | length 274.2
  Top w4: v2(-286,180) -284.85,181.15 -284.85,185.76 -276.86,193.75 -260.97,193.75 U1.48@-259.84,194.88
  Inner3 w4: U4.B14@-375.74,-14 -362,-14 -350.55,-2.55 -350.55,7.72 -347.27,11 -347.27,42.72 -342,47.99 -342,108.66 -303.51,147.15 -303.51,162.49 v2(-286,180)
SD_CD: U1.50 U4.B16 | length 352.3
  Top w4: v2(-288,161) -275.89,173.11 -261.93,173.11 U1.50@-259.84,175.2
  Inner3 w4: U4.B16@-375.87,-113.78 -363.78,-113.78 -355,-105 -355,-40.66 -342.55,-28.21 -342.55,3.96 -339.27,7.24 -339.27,39.41 -334,44.68 -334,105.34 -295.51,143.83 -295.51,152.96 -288,160.47 v2(-288,161)
SD_CLK: R22.1 U4.B19 | length 481.9
  Top w4: R22.1@-348.43,150.59 -338.94,141.11 -332.6,141.11 -310.49,119 -294.33,119 v2(-293.9,118.57)
  Inner3 w4: U4.B19@-375.87,-258.36 -370.36,-258.36 -353,-241 -353,-128.7 -339,-114.7 -339,-60.79 -329.21,-51.01 -329.21,-40.6 -326.55,-37.94 -326.55,-23.55 -308,-5 -308,48.05 -301.27,54.78 -301.27,110.38 -293.9,117.74 v2(-293.9,118.57)
SD_CLK_1: R22.2 U1.54 | length 106.3
  Top w4: R22.2@-348,172 -348,171.82 -332.77,156.59 -332.77,152.59 -315.18,135 -260.67,135 U1.54@-259.84,135.83
SD_CMD: U1.55 U4.B20 | length 562.7
  Top w4: U1.55@-225.2,125.99 -223.33,127.85 -204.15,127.85 v2(-203,129)
  Inner3 w4: v2(-306.85,-255.05) -306.85,-254.85 -296.55,-244.55 -296.55,-165.22 -294.76,-163.42 -294.76,-153.3 -296.86,-151.2 -296.86,-134.9 -318.5,-113.26 -318.5,-72.32 -295.18,-49 -289.21,-49 -267.49,-27.28 -267.49,31.64 -254,45.13 -254,61.29 -236,79.29 -236,100.87 -209.02,127.85 -204.15,127.85 v2(-203,129)
  Bottom w4: U4.B20@-376.01,-296.09 -348.09,-296.09 -307.05,-255.05 v2(-306.85,-255.05)
SD_D0: U1.52 U4.B18 | length 408.4
  Top w4: v2@-284.42,145.91 -276.4,153.93 -261.43,153.93 U1.52@-259.84,155.51
  Inner3 w4: U4.B18@-375.91,-195.99 -361.51,-181.59 -361.51,-125.89 -347,-111.39 -347,-47.08 -334.55,-34.63 -334.55,-0.91 -331.27,2.38 -331.27,36.1 -326,41.36 -326,102.03 -284.51,143.52 v2(-284.51,146)
SD_D1: U1.51 U4.B17 | length 451
  Top w4: U1.51@-225.2,165.36 -225.02,165.18 -203.18,165.18 v2(-203,165)
  Inner3 w4: v2(-307.5,-82.84) -306.71,-82.06 -306.71,-71.84 -291.87,-57 -285.89,-57 -254.28,-25.38 -254.28,33.54 -246,41.82 -246,57.97 -224,79.97 -224,101.56 -207.56,118 -195,118 -186,127 -186,146.85 -203,163.85 v2(-203,165)
  Bottom w4: U4.B17@-375.87,-162 -368.01,-162 -353.79,-147.77 -353.79,-128.33 -308.3,-82.84 v2(-307.5,-82.84)
SD_D2: U1.57 U4.B22 | length 627.6
  Top w4: U1.57@-225.2,106.3 -203.7,106.3 v2(-203,107)
  Inner3 w4: v2(-304,-112) -304,-111.45 -296.5,-103.95 -296.5,-72.94 -288.56,-65 -282.58,-65 -238,-20.42 -238,54.66 -203,89.66 v2(-203,107)
  Bottom w4: U4.B22@-375.6,-411 -368.01,-411 -339.9,-382.89 -339.9,-338.62 -294.76,-293.47 -294.76,-121.24 v2(-304,-112)
SD_D3: U1.56 U4.B21 | length 557.2
  Top w4: v2(-281,124) -281,123.91 -275.61,118.52 -262.22,118.52 U1.56@-259.84,116.14
  Inner3 w4: U4.B21@-375.21,-363.78 -368.78,-363.78 -331,-326 -331,-257.22 -323.84,-250.06 -323.84,-165.84 -326.5,-163.18 -326.5,-59.61 -321.21,-54.32 -321.21,-43.92 -318.55,-41.25 -318.55,-26.86 -300,-8.31 -300,44.74 -293.06,51.67 -293.06,102.94 -281,115 v2(-281,124)
SD_WP: U1.49 U4.B15 | length 372
  Top w4: U1.49@-225.2,185.04 v2(-203,185) v2(-203,185)
  Inner3 w4: v2(-310.21,-48.47) -310.21,-29.84 -292,-11.63 -292,18.8 -283.05,27.75 -282.69,27.75 -263.35,47.1 -263.35,63.25 -244,82.6 -244,144 v2(-203,185)
  Bottom w4: U4.B15@-375.47,-64 -325.74,-64 v2(-310.21,-48.47)
SPI_CLK: R4.1 R21.2 U1.25 U4.A9 | length 453.4
  Top w4: R21.2@-107,367 -106.87,367.13 R4.1@-82.68,367.13 ; R4.1@-83,367 -80.58,367 -68.15,354.57 -68.15,350.85 v1@-70,349 ; U1.25@-72.83,322.84 -72.83,346.17 v1@-70,349 ; v1(-67,346) v1@-70,349
  Inner3 w4: U4.A9@-100,691.14 -100,650.49 -55.8,606.3 -55.8,452.2 -70.62,437.38 -70.62,359 -70,358.39 -70,353.36 -68.15,351.51 -68.15,347.15 v1(-67,346)
SPI_CLK_1: R4.2 U3.6 | length 166.5
  Top w4: R4.2@-82.68,388.78 -80.71,388.78 -77.79,391.7 -77.79,400.82 22.39,501 U3.6@32,501
SPI_CS0: R5.1 U1.28 U3.1 U4.A12 | length 842.1
  Top w4: v2(-331,554) -334.65,550.35 R5.1@-334.65,538.39 -332.68,538.39 R5.1@-329.76,541.31 ; U3.1@-291.55,596.06 -286.61,601 U3.1@-280,601 ; U3.1@-268.05,602.56 -246,624.61 U4.A12@-246,691.78 ; U1.28@-102.36,288.19 -102.18,288.01 -102.18,264.18 v2(-102,264)
  Top w8: U3.1@-276.55,602.56 U3.1@-268.05,602.56
  Inner3 w4: U4.A12@-253,691.1 -253,662.26 -95,504.26 -95,396.44 -100,391.44 -100,349.76 -100,308.69 -102,306.69 v2(-102,264)
  Bottom w4: v2(-331,554) -331,578.06 -318.78,590.28 -305.17,590.28 -253,642.44 U4.A12@-253,692.36
SPI_CS1: R19.2 R20.2 U1.24 U4.A8 | length 602.4
  Top w4: v2(-63,264) U1.24@-62.99,288.19 ; R19.2@-10.85,367.15 R20.2@10.98,367.15 ; v2(-0.81,354.19) 6.11,361.11 6.11,364.25 R20.2@9.01,367.15
  Inner3 w4: v2(-63,264) -63,333 -46.35,349.65 -46.35,423 ; U4.A8@-46.35,698.35 -46.35,423 ; v2(-29,423) -46.35,423
  Inner4 w4: v2(-29,423) -29,422.66 -24,417.66 -24,377 -1.19,354.19 v2(-0.81,354.19)
SPI_MISO: U1.26 U3.2 U4.A10 | length 704.4
  Top w4: U3.2@-276.55,552.56 -228.56,552.56 v2(-228,552) ; U1.26@-82.68,288.19 -82.68,264.68 v2(-82,264)
  Inner3 w4: U4.A10@-144,690.01 -144,683.18 -63.8,602.98 -63.8,457.2 -78.62,442.38 -78.62,353.67 -78,353.06 -78,345.47 -82,341.47 v2(-82,264)
  Bottom w4: v2(-228,552) -228,595.92 -167.69,656.24 U4.A10@-167.69,690.89
SPI_MOSI: R18.2 U1.27 U3.5 U4.A11 | length 646.9
  Top w4: R18.2@-130.83,370 -117.03,356.2 -106.44,356.2 -100,349.76 -100,348.76 -94.49,343.25 ; U1.27@-92.52,322.84 -94.25,324.56 -94.25,343.01 -94.49,343.25 ; v2(-89,350.02) -89,348.74 -94.49,343.25 ; v2(1.57,444.43) 3.19,444.43 4.81,446.06 25.95,446.06 U3.5@32.45,452.56
  Inner3 w4: U4.A11@-200,689.86 -200,665 -87,552 -87,393.13 -89,391.13 v2(-89,350.02)
  Bottom w4: v2(-89,350.02) -48,391.03 -48,419.56 -32.35,435.2 -6.8,435.2 1.57,443.57 v2(1.57,444.43)
SPIFLASH_NRESET: R7.1 U3.7 | length 435.4
  Top w4: R7.1@-333.72,596.72 -330.31,600.13 -310.87,600.13 v2(-309.72,601.28) ; v2(-245,564) -245,566.59 -192.53,619.06 -51.56,619.06 -51.5,619 -42.49,619 23.95,552.56 U3.7@32.45,552.56
  Inner3 w4: v2(-309.72,601.28) -308.57,600.13 -300.85,600.13 -296.72,596 -277,596 v2(-245,564)
SPIFLASH_NWP: R6.1 U3.3 | length 107.6
  Top w4: R6.1@-336,477 -334.28,477 -319.14,461.86 v2(-319.14,461.26) ; v2(-307,505) -278.99,505 U3.3@-276.55,502.56 ; U3.3@-284.61,503 U3.3@-281,503
  Inner3 w4: v2(-319.14,461.26) -307,473.4 v2(-307,505)
TXD0: R17.2 U1.30 U4.B1 | length 705.6
  Top w4: v2(-276,354) -275.59,354.41 R17.2@-275.59,367.13 ; v2(-123,264) -122.52,264.48 -122.52,287.71 U1.30@-122.05,288.19
  Inner3 w4: U4.B1@-375.74,645.67 -350.39,645.67 -338.38,633.65 -338.38,614.38 -266.79,542.79 -266.79,499.23 -157.56,390 -154.13,390 -122,357.87 -122,265 v2(-123,264) ; -244,477 -235,486 v2(-235,487)
  Bottom w4: v2(-276,354) -276,384.44 -263,397.44 -263,459 v2(-235,487)
TXD1: R14.1 U1.147 U4.C6 | length 546.6
  Top w3.63: v2(144,191) 149.96,185.04 U1.147@177.95,185.04
  Top w4: R14.1@216,430.17 217.97,430.17 242.14,406 346.18,406 363.18,389 U4.C6@375.01,389
  Inner3 w3.63: v2(144,191) 142.78,192.22 142.78,200.19 142.73,200.24 142.73,209.2 154.89,221.37 175.37,221.37 223.82,269.82 251.71,269.82 275.51,293.61 275.51,309.12 352.39,386 U4.C6@375.8,386
TXD2: U1.47 U4.B13 | length 289.8
  Top w4: U1.47@-225.2,204.73 -203.27,204.73 v2(-203,205)
  Inner3 w4: U4.B13@-376.01,57.05 -368.14,57.05 -350.39,74.8 -350.39,131.5 -290.89,191 -217,191 v2(-203,205)
USB_D+: U1.61 U4.B23 | length 696.7
  Top w3.6: U4.B23@-375.82,-477.93 -363.51,-477.93 -361.4,-475.82 -361.4,-48.24 -308.2,4.96 -308.2,31.47 -308.38,31.66 -308.38,54.42 -299.04,63.77 v1(-282.06,63.77)
  Top w3.61: U1.61@-225.2,66.93 -225.15,66.88 -205.07,66.88 v1(-205.02,66.83)
  Bottom w3.61: v1(-282.06,63.77) -280.33,63.77 -276.87,67.24 -205.42,67.24 v1(-205.02,66.83)
USB_D-: U1.62 U4.B24 | length 626.7
  Top w3.6: U4.B24@-375.82,-495.9 -375.82,-492.75 -375.49,-492.42 -375.49,-492.11 -369.91,-486.53 -359.95,-486.53 -352.8,-479.39 -352.8,-51.8 -299.6,1.4 -299.6,35.04 -299.78,35.22 -299.78,50.86 -297.67,52.97 -273.49,52.97 -269.42,57.04 U1.62@-259.89,57.04
USB_VRT: R24.1 U1.59 | length 195.1
  Top w4: R24.1@-333.79,26.79 -333.29,26.29 -319.29,26.29 v2(-319,26) ; U1.59@-225.2,86.62 -200.62,86.62 v2(-195,81)
  Inner4 w4: v2(-319,26) -319,27.17 -293.4,52.77 -277.51,52.77 -249.28,81 v2(-195,81)
VDD_FLASH: C75.1 R5.2 R6.2 R7.2 U3.8 U4.A7 | length 91.7
  Top w8: v2(-349.32,453.81) R6.2@-333.45,453.81 ; R5.2@-334.65,516.73 -334.51,516.87 -321.13,516.87 v1(-321,517) ; R7.2@-334.65,575.79 -334.54,575.69 -318.02,575.69 v2(-317.92,575.58) ; v3(-4.61,611.29) 4.12,602.56 U3.8@23.95,602.56 ; v3(102.29,594.73) v3(102.29,594.73) 102.33,581.73 C75.1@102.36,581.69
XTALIN: U1.151 X3.3 | length 329.8
  Top w3.63: v2(146,229) 147.72,229 149.65,227.07 175.29,227.07 U1.151@177.95,224.41 ; X3.3@322,358 v2(322,395)
  Inner3 w3.63: v2(146,229) 168,229 218.18,279.18 226.88,279.18 269.88,322.18 273.48,322.18 322,370.7 v2(322,395)
pads on no net: U1.9 U1.11 U1.12 U1.37 U2.A2 U2.A8 U2.E2 U2.E8 U2.R3 U2.R7

## Polygon pours and split planes (outlines as drawn)
GND on Top "GND_L01_P006" (solid, pour order 6): -393.7,716.54 393.7,716.54 393.7,-669.29 -393.7,-669.29
LXBK on Top "Top-LXBK" (solid, remove dead copper, pour order 5): 194,-92 194,-117.24 215,-117.24 215,-186.52 292.32,-186.52 292.32,-129.11 252,-129.11 252,-92
1V2 on Top "Top-1V2" (solid, remove dead copper, pour order 4): 194.88,-191.87 194.88,-261.88 287.36,-261.88 287.36,-236.11 358.13,-236.11 358.13,-157.25 296.26,-157.25 296.26,-191.87
GND on Bottom "GND_L06_P003" (solid, pour order 3): -393.7,716.54 393.7,716.54 393.7,-669.29 -393.7,-669.29
1V2 on Bottom "1V2_L06_P002" (solid, pour order 2): -323,132 -185,132 -185,248 -51.18,248 -51.18,374.02 -15.75,374.02 -15.75,248 143,248 143,173 267.72,173 267.72,93 161,93 161,57.33 304.55,57.33 304.55,11.81 153,11.81 153,-60 242,-60 242,-133.86 354.33,-133.86 354.33,-271.65 188.98,-271.65 188.98,-117 94.49,-117 -63,-117 -63,-177.17 -122.05,-177.17 -122.05,-117 -222,-117 -222,82.68 -323,82.68
1V8 on PWR (split plane): 194.9,-17 195.29,-18.95 196.4,-20.6 198.05,-21.71 200,-22.1 307.9,-22.1 307.9,-46.9 200,-46.9 198.05,-47.29 196.4,-48.4 195.29,-50.05 194.9,-52 194.9,-159 195.29,-160.95 196.4,-162.6 198.05,-163.71 200,-164.1 223.25,-164.1 223.25,-318.9 223.64,-320.85 224.74,-322.5 226.4,-323.61 228.35,-324 298.05,-324 298.05,-659.2 -383.61,-659.2 -383.61,51.9 194.9,51.9
3V3 on PWR (split plane): 383.61,-659.2 308.25,-659.2 308.25,-318.9 307.86,-316.95 306.75,-315.29 305.1,-314.19 303.15,-313.8 233.44,-313.8 233.44,-159 233.06,-157.05 231.95,-155.4 230.3,-154.29 228.35,-153.9 205.1,-153.9 205.1,-57.1 313,-57.1 314.95,-56.71 316.6,-55.6 317.71,-53.95 318.1,-52 318.1,-17 317.71,-15.05 316.6,-13.4 314.95,-12.29 313,-11.9 205.1,-11.9 205.1,57 204.71,58.95 203.6,60.6 201.95,61.71 200,62.1 -383.61,62.1 -383.61,426.61 107.13,426.61 109.08,427 110.74,428.1 111.84,429.75 112.23,431.71 112.23,698.58 383.61,698.58
VDD_FLASH on PWR (split plane): 102.03,436.8 -383.61,436.8 -383.61,698.58 102.03,698.58
GND on GND (split plane): 383.61,-659.2 -383.61,-659.2 -383.61,698.58 383.61,698.58

## Other copper
Bottom:
  rectangle net GND: -141.73,-31.5 94.49,204.72
PWR (plane layer: these items are gaps in the copper):
  lines w10: -394.05,704.91 -390.79,708.17 ; 254.18,-669.29 -393.7,-669.29 ; -393.7,-669.29 -393.7,57 200,57 200,-17 313,-17 313,-52 200,-52 200,-159 228.35,-159 228.35,-318.9 303.15,-318.9 303.15,-669.29 -393.7,-669.29 ; -393.7,431.71 -393.7,708.66 107.13,708.66 107.13,431.71 -393.7,431.71

## Silkscreen, mask and mechanical layers (free items; w line width, h text height)
Silkscreen Top:
  text "NW0101 Rev.A" at 295.8,-628.84 h20 r90
Solder Mask Bottom:
  region: 95,205 95,-34 93,-32 -142,-32 -142,205
Shield Drawing:
  lines w10: 200.79,669.29 200.79,494.09 358.27,494.09 358.27,-653.54 -358.27,-653.54 -358.27,669.29 201.07,669.29
Outline:
  lines w0.01: -393.7,-669.29 -393.7,708.66 393.7,708.66 393.7,-669.29 -393.7,-669.29
  lines w47.24: -393.7,-669.29 -393.7,708.66 393.7,708.66 393.7,-669.29 -393.7,-669.29
Drill Drawing:
  lines w1: -200.79,0 -200.76,0 ; 0,-295.28 0.03,-295.28 ; 23.62,122.05 23.65,122.05 ; 0,295.28 0.03,295.28 0,295.28 ; 200.79,0 200.81,0

## Dimensions
432.29,568.73 to 447.95,494.1 on Shield Drawing
368.93,415.41 to 365.06,-132 on Shield Drawing
-358.27,-580.71 to 358.27,-561.02 on Shield Drawing
358.27,454.72 to -358.27,602.36 on Shield Drawing
200.79,622.05 to 358.27,454.72 on Shield Drawing
49.32,678.2 to 200.79,622.05 on Shield Drawing
49.2,678.24 to -293.37,678.57 on Shield Drawing
-358.27,602.36 to -293.39,678.4 on Shield Drawing
-238.39,-632.29 to 167.02,-637.92 on Shield Drawing
167.5,-637.82 to 358.27,-561.02 on Shield Drawing
-358.27,-580.71 to -238.33,-632.18 on Shield Drawing
364.57,-131.99 to 366.65,-230.22 on Shield Drawing
-370.13,-19.6 to -364.49,-501.98 on Shield Drawing
-364.47,-502.02 to -301.18,-653.54 on Shield Drawing
127.95,669.29 to 247.47,568.79 on Shield Drawing
368.94,415.42 to -393.7,716.54 on Shield Drawing
365.56,-462.74 to 366.65,-230.29 on Shield Drawing
265.75,-653.54 to 365.5,-462.74 on Shield Drawing
-370.33,-19.78 to -368.35,98.5 on Shield Drawing
-369.53,529.59 to -368.19,98.44 on Shield Drawing
-328.74,669.29 to -367.35,529.63 on Shield Drawing
127.95,669.29 to 265.75,-653.54 on Shield Drawing
-328.74,669.29 to -301.18,-653.54 on Shield Drawing
-23.62,86.61 to -393.7,-669.29 on Drill Drawing
393.7,708.66 to 300,708.66 on Drill Drawing
-50,708.66 to 0,708.66 on Drill Drawing
-393.7,708.66 to -300,708.66 on Drill Drawing
-393.7,-310.63 to -393.7,-260.63 on Drill Drawing
-393.7,708.66 to -393.7,639.37 on Drill Drawing
-393.7,-669.29 to -393.7,-560.63 on Drill Drawing
-23.62,86.61 to -393.7,-669.29 on Drill Drawing
-393.7,708.66 to 393.7,708.66 on Drill Drawing
393.7,708.66 to 393.7,-669.29 on Drill Drawing